# Altium PCB PCB1.PcbDoc (part 1 of 2)
Units mm, origin at the board's own origin, x right, y up, seen from the top; angles counter-clockwise.
Board outline 50 x 50 mm, 4 copper layers (Top Layer, GND, VCC, Bottom Layer), stack 1.991 mm thick; 34 components, 63 nets, 262 pads, 258 vias.
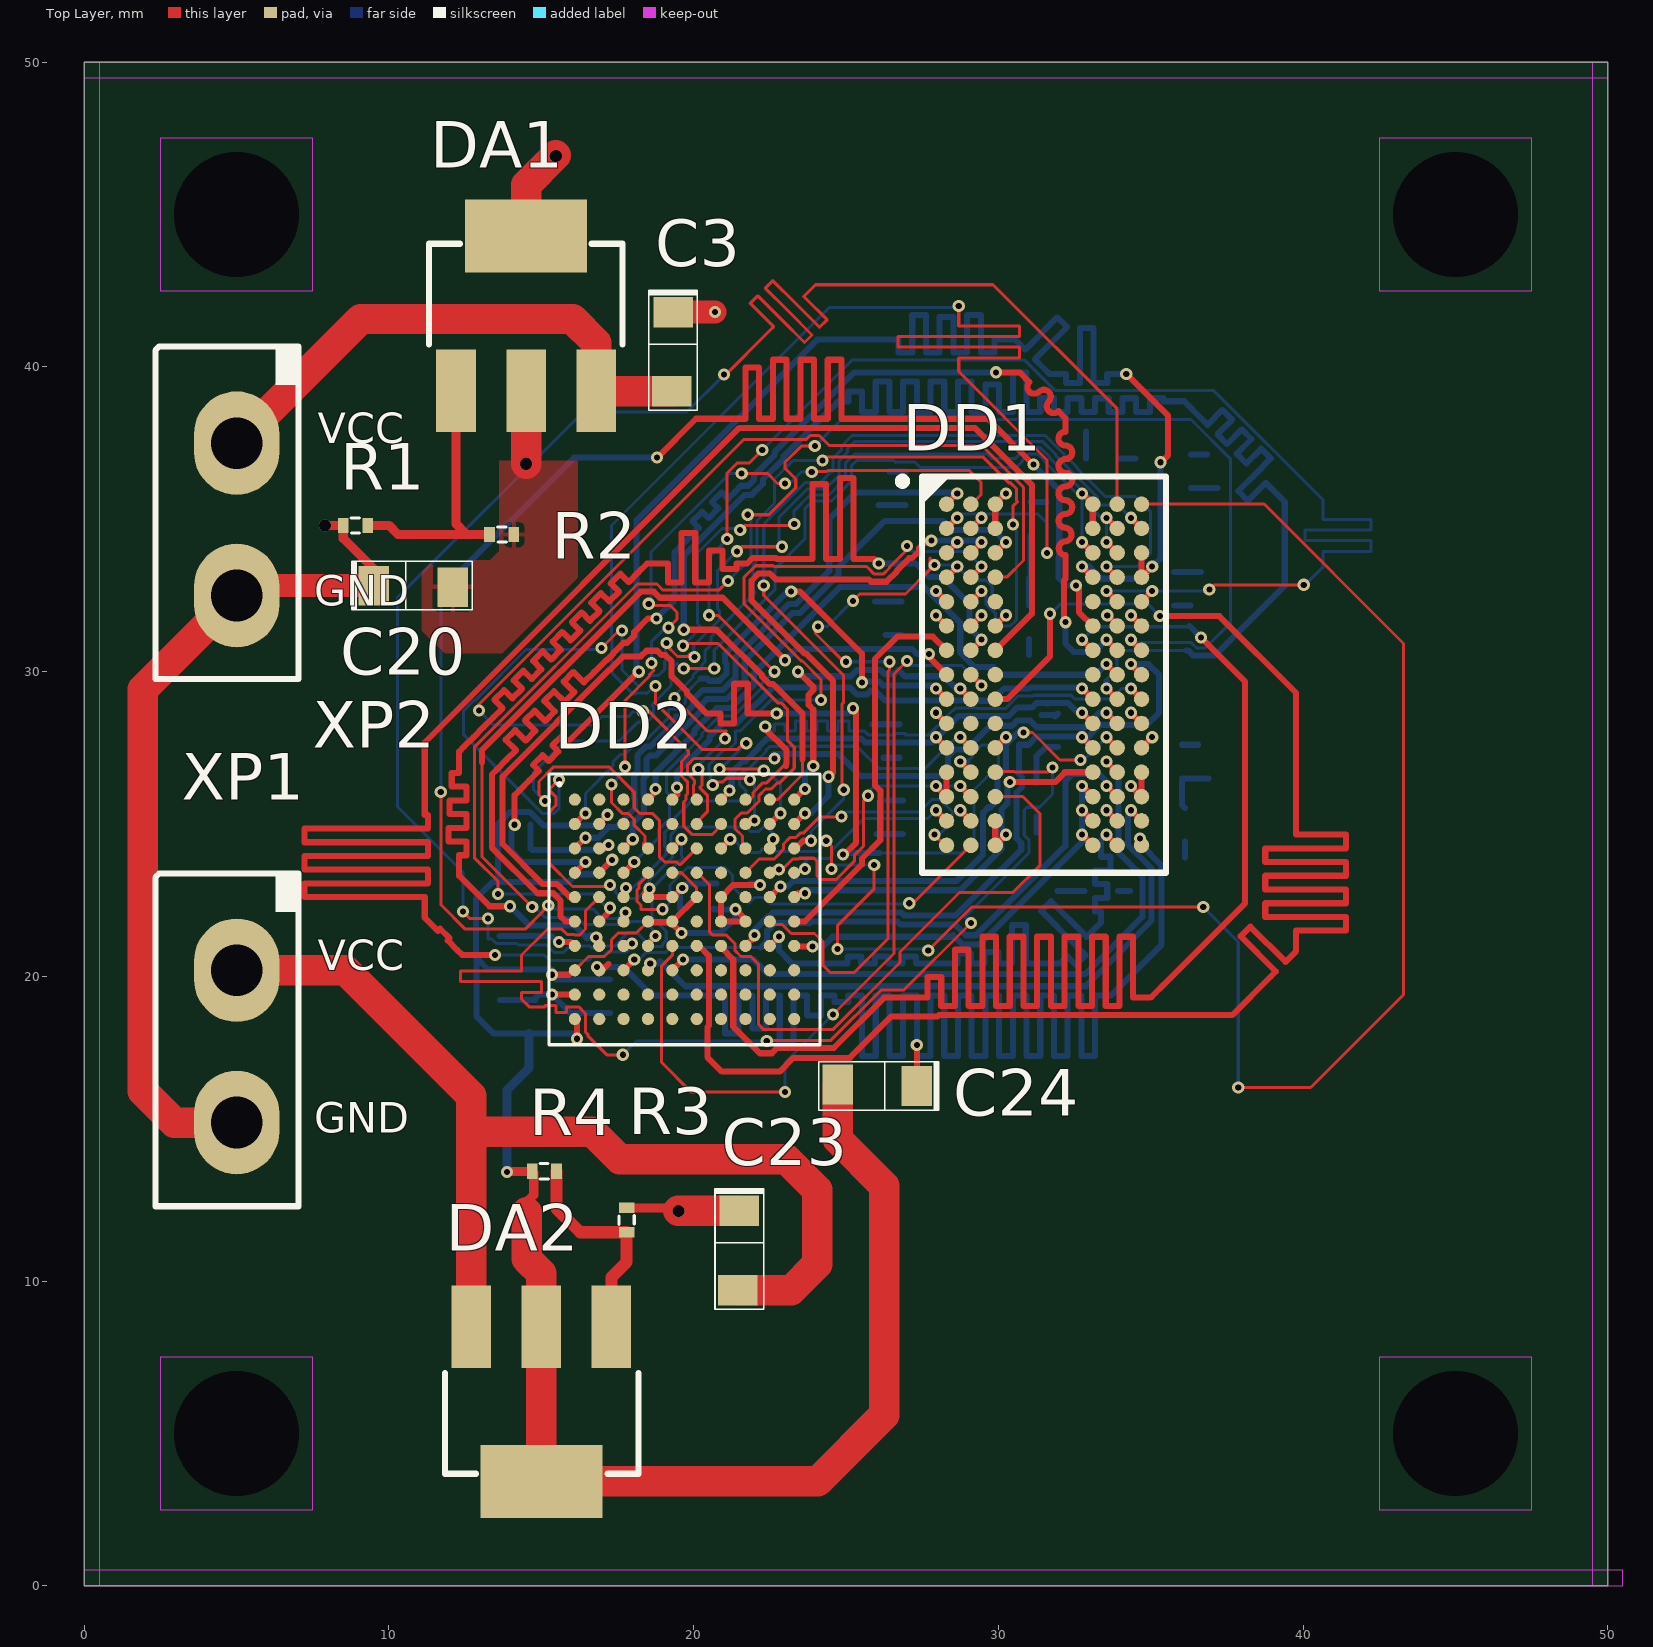
[diagram p0: Top Layer view]
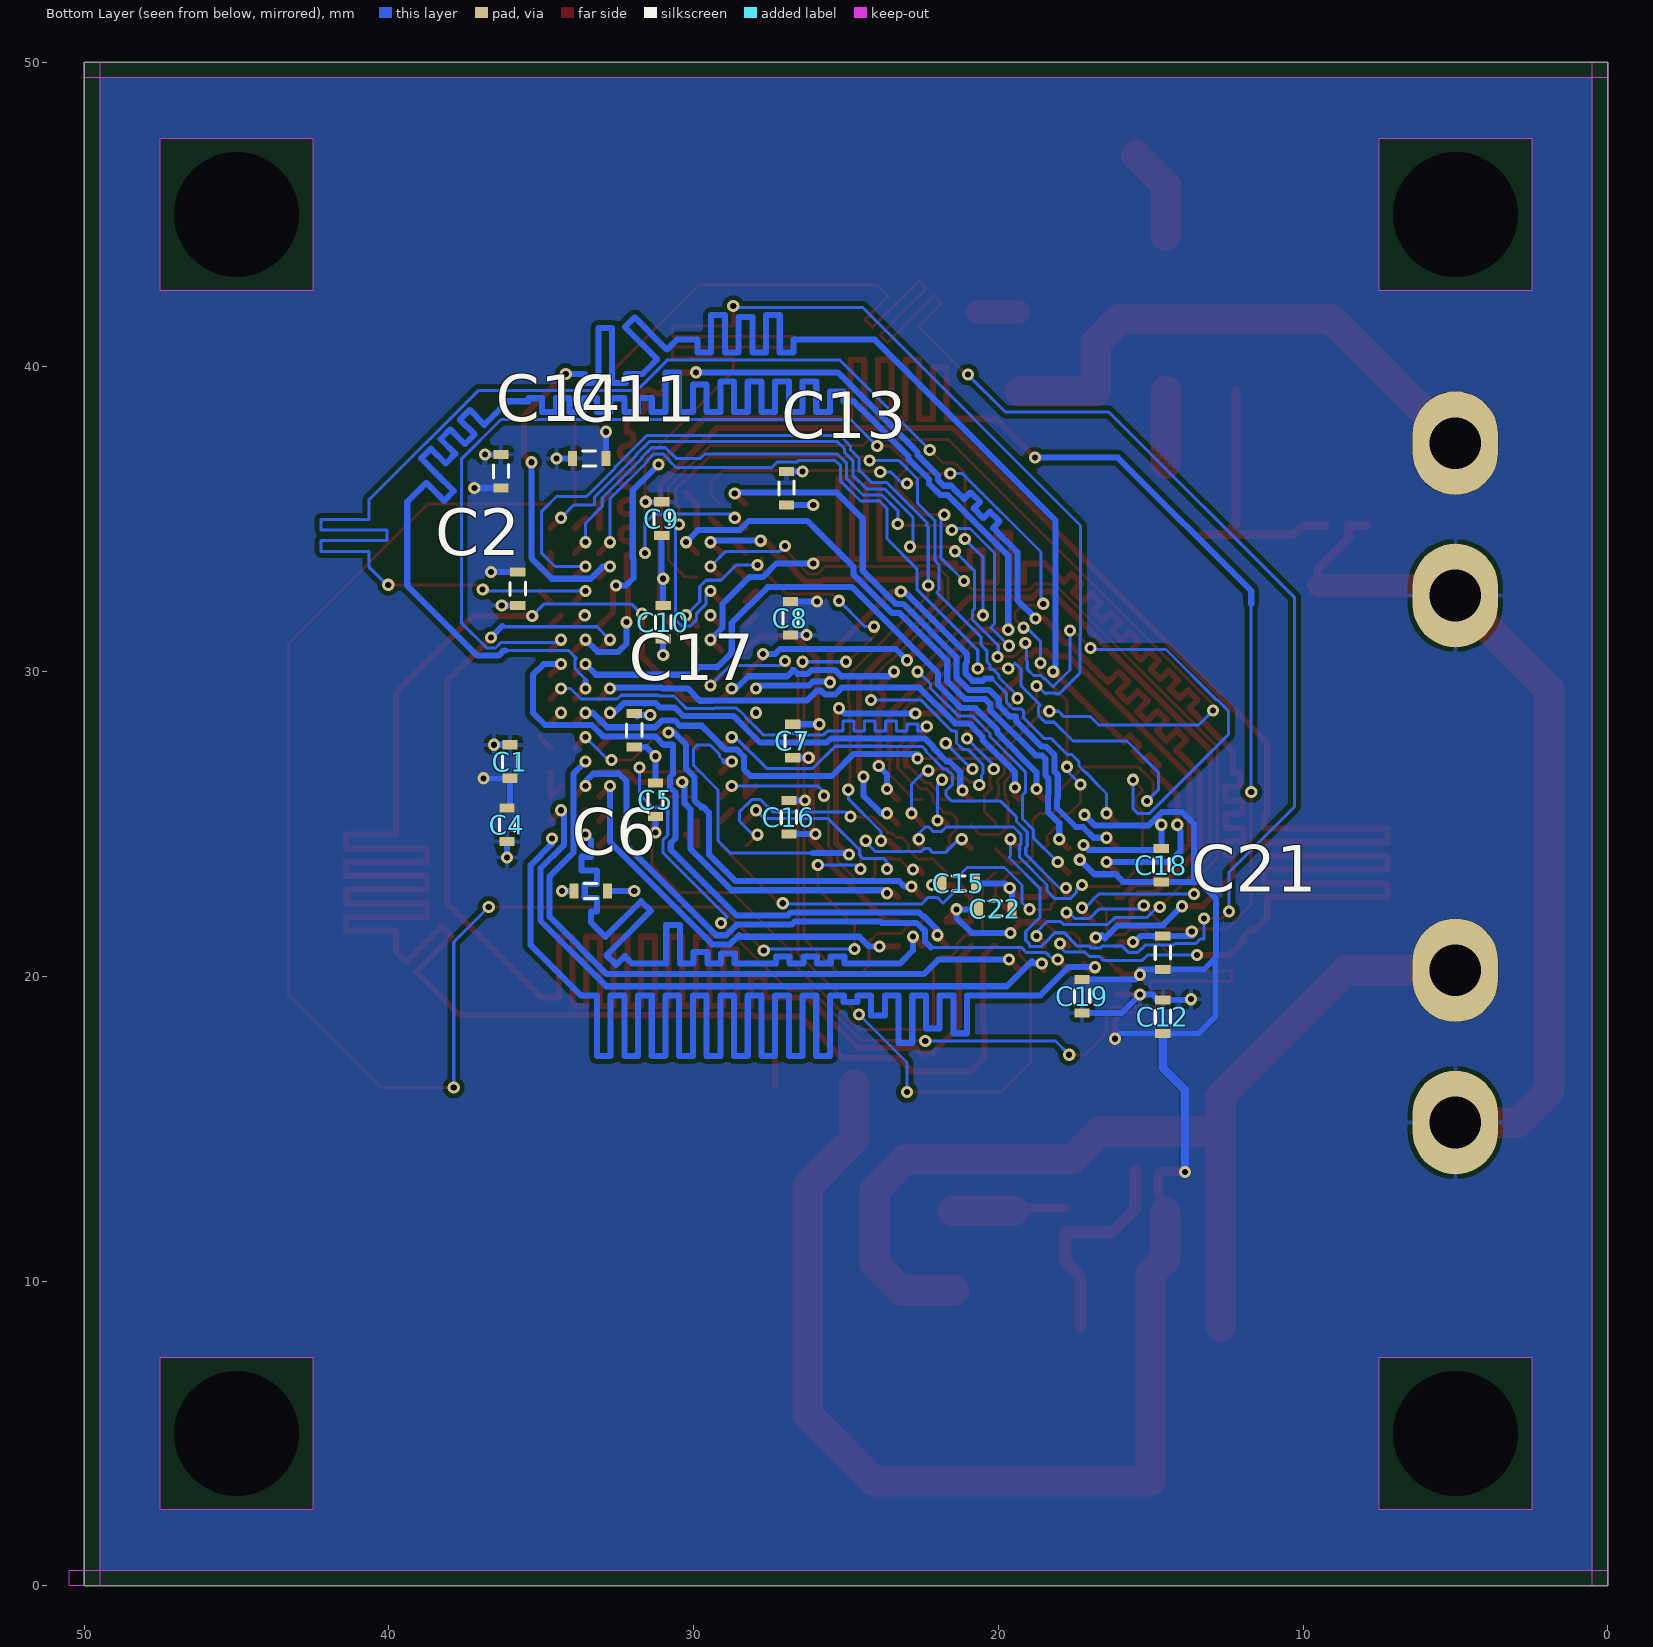
[diagram p1: Bottom Layer view, seen from below]
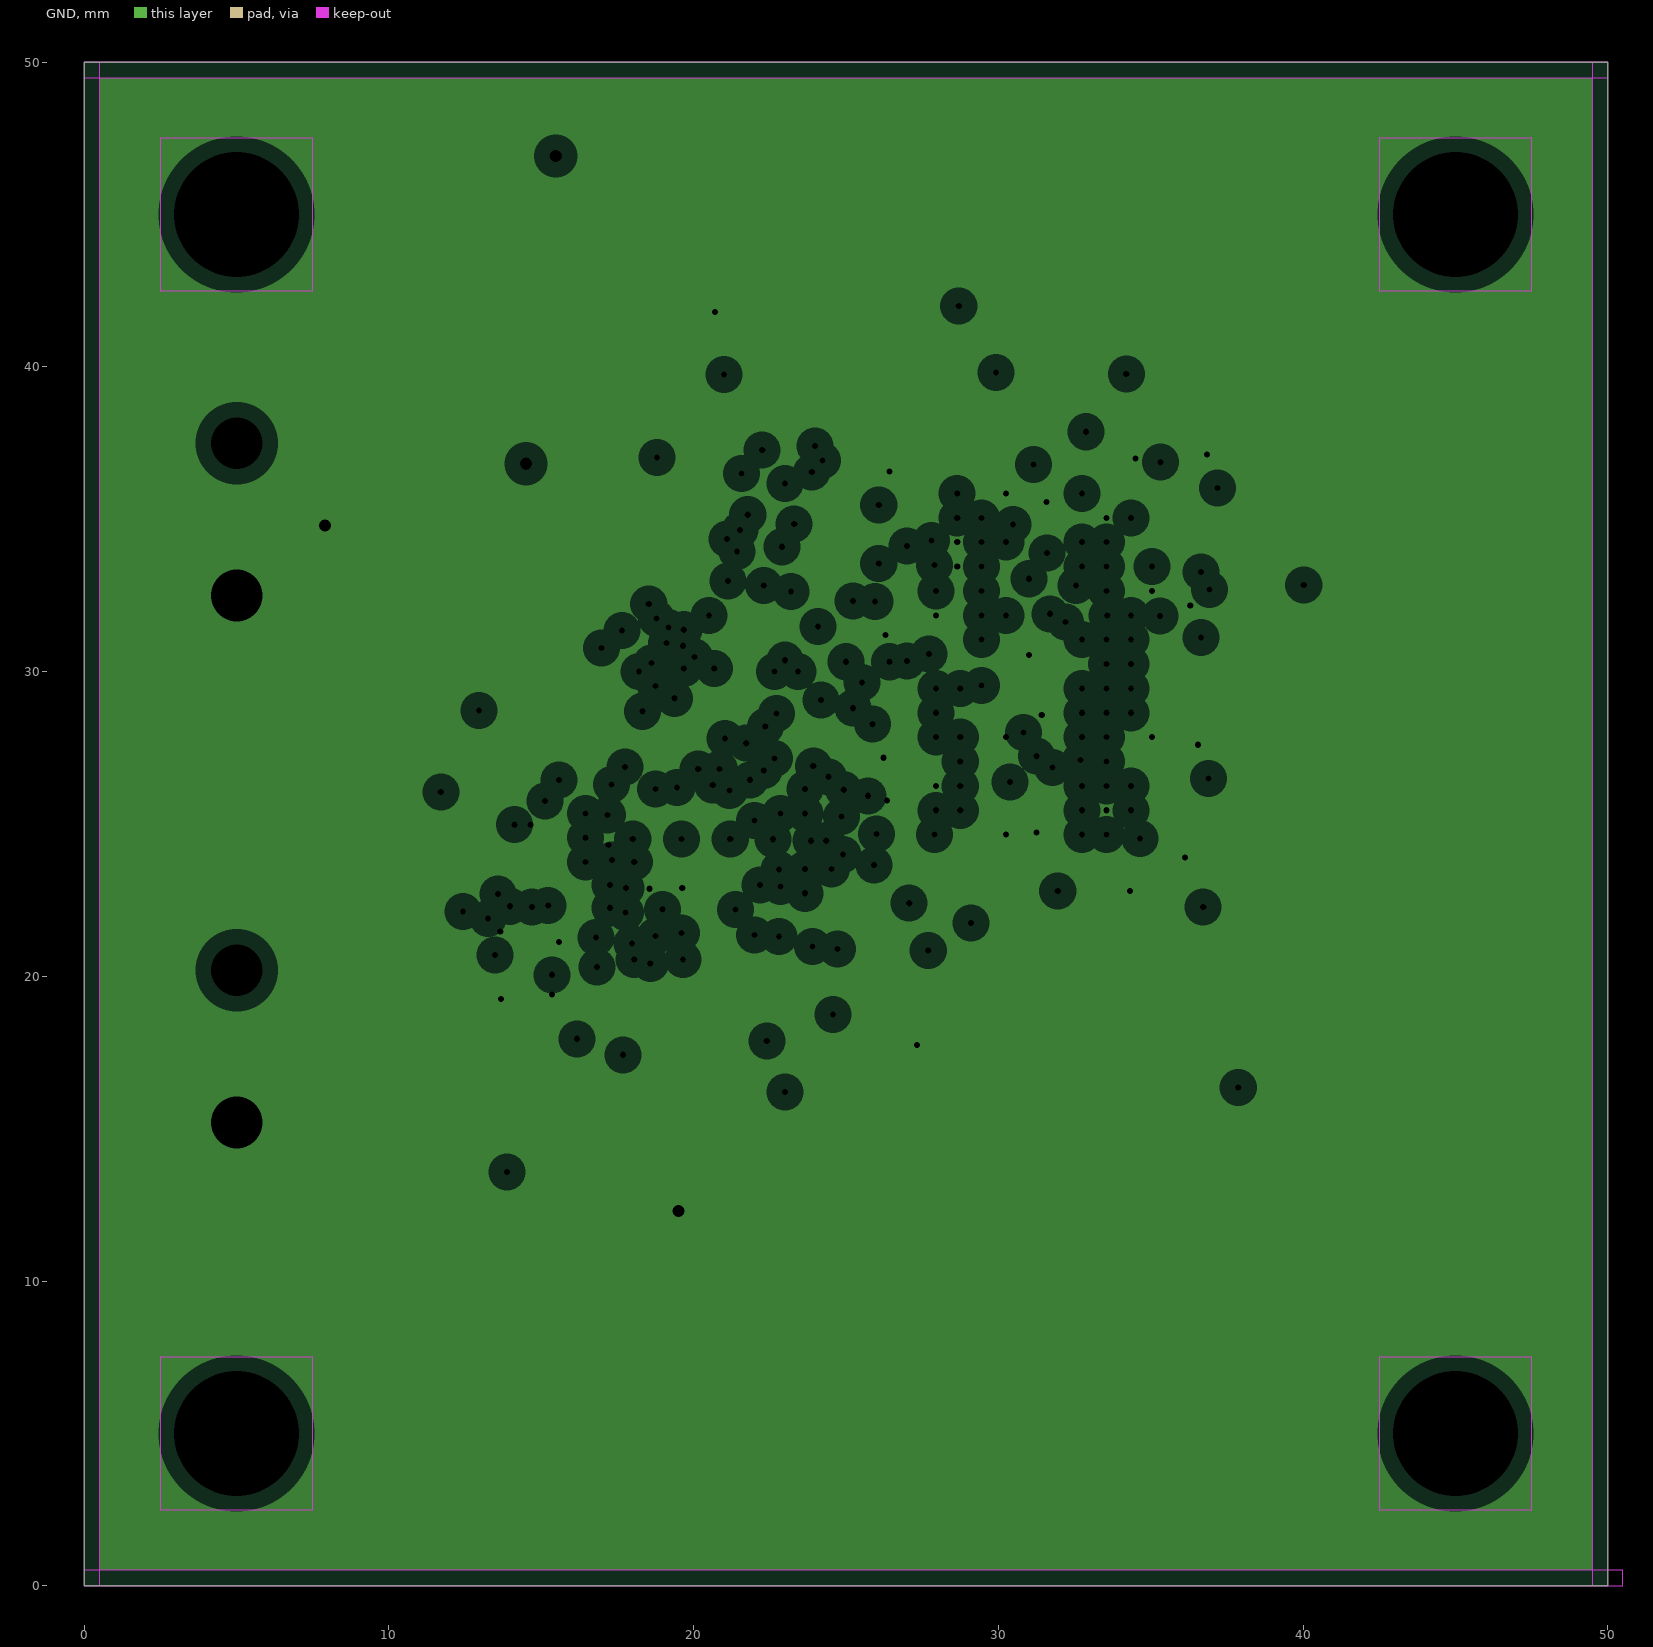
[diagram p2: GND, clearances drawn from the general rule]
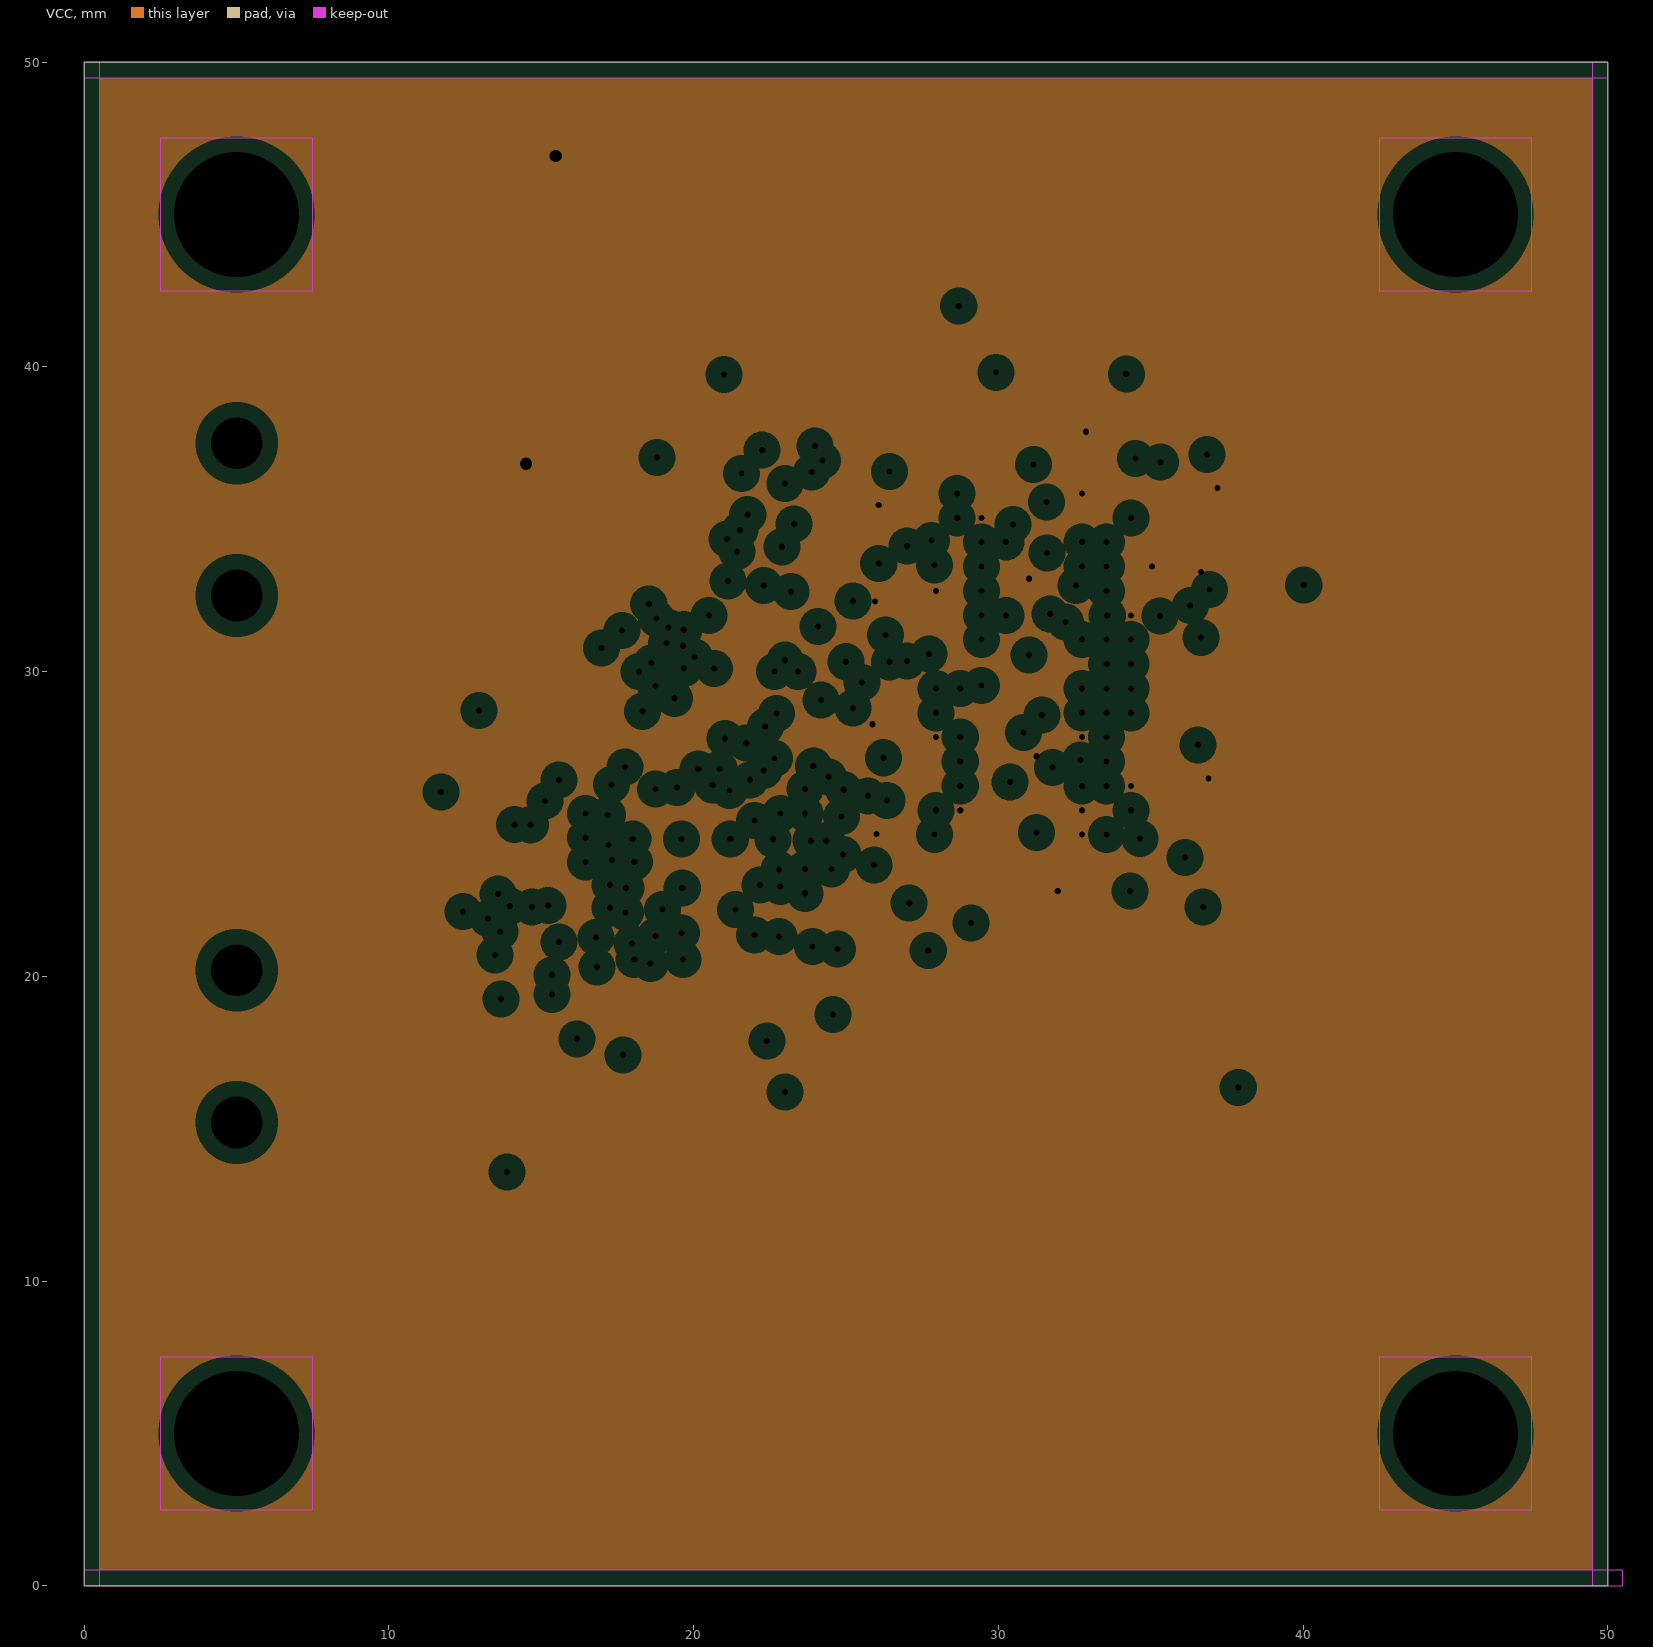
[diagram p3: VCC, clearances drawn from the general rule]
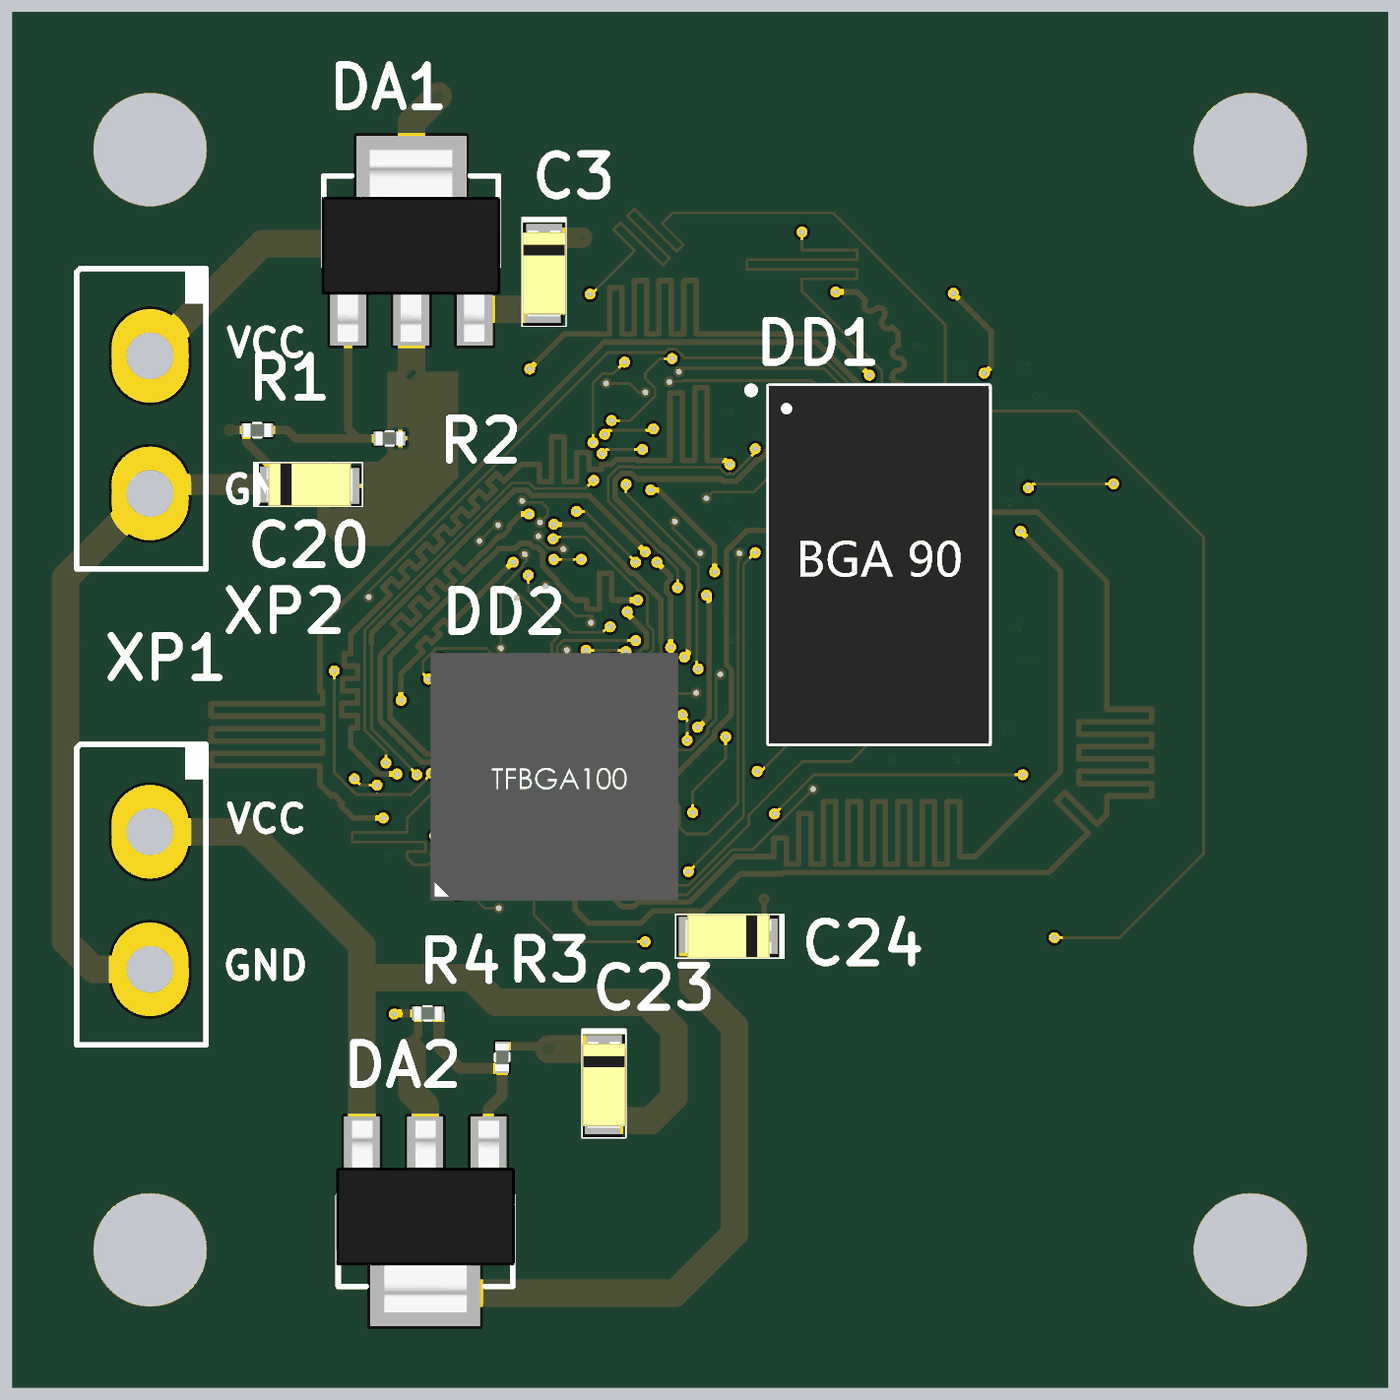
[diagram p5: 3D render of the assembled board from above, using the file's embedded part models]
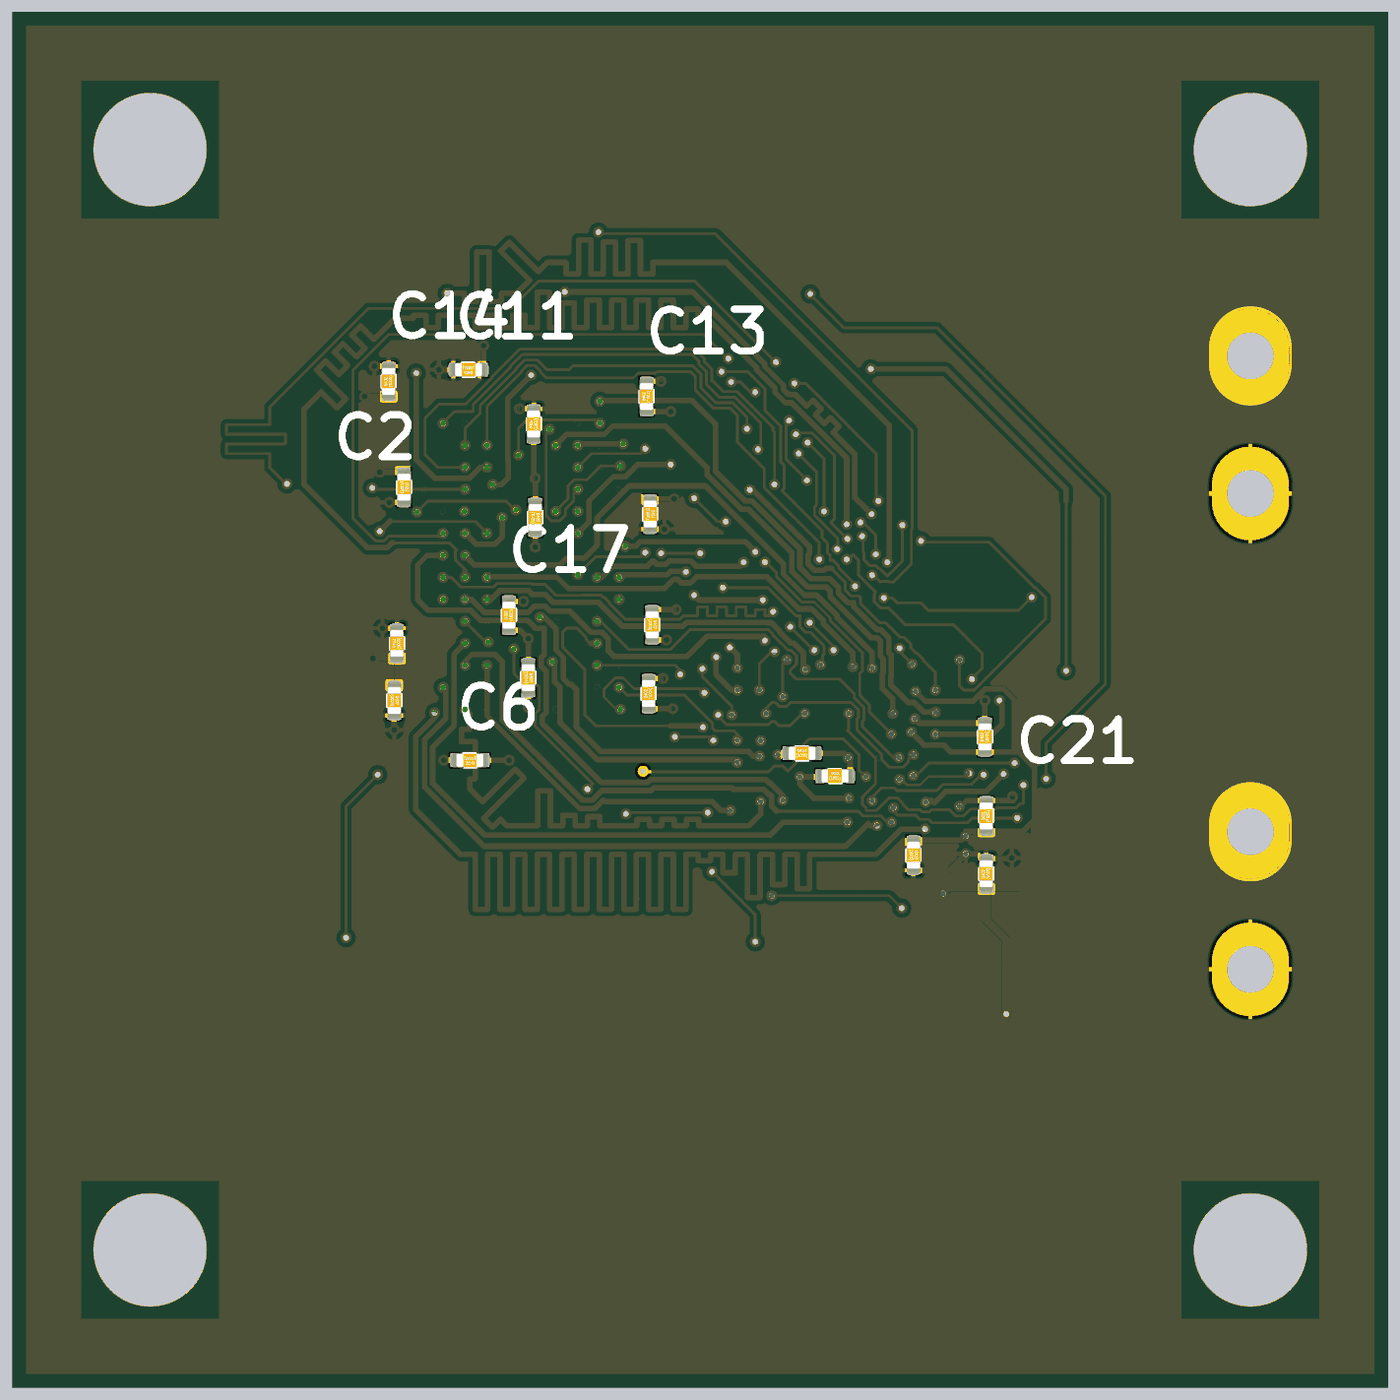
[diagram p6: 3D render of the assembled board from below, using the file's embedded part models]

## Layer stack, top to bottom
Top Solder: solder mask 0.0102, Solder Resist, Dk 3.5
Top Layer: signal copper 0.035
Dielectric 1: prepreg 0.57, FR-4, Dk 4.2
GND: plane copper 0.035, net GND
Dielectric 3: core 0.71, Dk 4.2
VCC: plane copper 0.035, net +3V3
Dielectric 2: prepreg 0.57, Dk 4.2
Bottom Layer: signal copper 0.0356
Bottom Solder: solder mask 0.0102, Solder Resist, Dk 3.5

## Board outline
0,0 50,0 50,50 0,50

## Design rules (kind name [scope] priority, off if disabled: settings)
Clearance Clearance_viaGND [IsStitchingVia and InNet('GND')] p1: gap=0.3 ignorepadtopadclearanceinfootprint=FALSE except(0.5: Arc-Hole Track-Hole SMDPad-Hole THPad-Hole Via-Hole Fill-Hole Poly-Hole Region-Hole Text-Hole)
Clearance Clearance_Via [(OnLayer('GND')OR OnLayer('VCC'))AND IsVia] p2: gap=0.25 ignorepadtopadclearanceinfootprint=FALSE except(0.15: Poly-Poly; 0.3: THPad-THPad; 0.5: Arc-Hole Track-Hole SMDPad-Hole THPad-Hole Via-Hole Fill-Hole Poly-Hole Region-Hole Text-Hole)
Clearance Clearance_Pol [(OnLayer('GND')OR OnLayer('VCC'))AND InPolygon] p3: gap=0.1 ignorepadtopadclearanceinfootprint=FALSE except(0.5: Arc-Hole Track-Hole SMDPad-Hole THPad-Hole Via-Hole Fill-Hole Poly-Hole Region-Hole Text-Hole)
Clearance Clearance_Dig [InNetClass('DIGIt')] p4: gap=0.15 ignorepadtopadclearanceinfootprint=FALSE except(0: Arc-Hole Track-Hole SMDPad-Hole THPad-Hole Via-Hole Fill-Hole Poly-Hole Region-Hole Text-Hole; 0.1: Arc-Arc Arc-Track Arc-SMDPad Arc-Via Arc-Fill Track-Track Track-SMDPad Track-Via Track-Fill SMDPad-SMDPad SMDPad-Via SMDPad-Fill THPad-Via THPad-Fill Via-Via Via-Fill Fill-Fill; 0.3: THPad-THPad; 0.5: Arc-THPad Track-THPad SMDPad-THPad)
MatchedLengths [InNetClass('DIGIt')] p1: tolerance=2 checknetsindiffpair=FALSE checkdiffpairvsdiffpair=TRUE checkxsignals=TRUE checkothers=TRUE
PlaneClearance [InNetClass('DIGIt') OR InNetClass('Power')] p1: clearance=0.25
PlaneConnect [InNetClass('DIGIt') OR InNetClass('Power')] p1: planeconnectstyle=Relief reliefexpansion=0.3 reliefentries=4 reliefconductorwidth=0.15 reliefairgap=0.15
PolygonConnect [InNetClass('DIGIt') OR InNetClass('Power')] p1: connectstyle=Relief reliefconductorwidth=0.15 reliefentries=4 polygonreliefangle="90 Angle" airgapwidth=0.15
RoutingVias [InNetClass('DIGIt')OR InNetClass('Power')] p1: holewidth=0.2 width=0.4 viastyle="Through Hole" minholewidth=0.2 minwidth=0.4 maxholewidth=0.2 maxwidth=0.4
SolderMaskExpansion [All] p1: expansion=0.102
Width Width_Power [InNetClass('Power')] p1: maxlimit=10 minlimit=0.1 preferedwidth=0.5
Width Width_Dig [InNetClass('DIGIt')] p2: maxlimit=1 minlimit=0.1 preferedwidth=0.4
28 further rules are at their usual default settings.

## Classes and differential pairs
net class DIGIt: A0 A1 A2 A3 A4 A5 A6 A7 A8 A9 A10 A11 BA0 BA1 CAS CKE CLK CS DQ0 DQ1 DQ2 DQ3 DQ4 DQ5 DQ6 DQ7 DQ8 DQ9 DQ10 DQ11 DQ12 DQ13 DQ14 DQ15 DQ16 DQ17 DQ18 DQ19 DQ20 DQ21 DQ22 DQ23 DQ24 DQ25 DQ26 DQ27 DQ28 DQ29 DQ30 DQ31 DQM0 DQM1 DQM2 DQM3 RAS WE
net class Power: +1V8 +3V3 GND NetC3_1 NetC23_1 NetDA2_1

## Components (designator, comment, footprint, x,y, rotation, side; value= is the part's Value field where it differs from the comment)
C1 "*" CAP0402_min 36.025,27.05 r90 bottom
C2 "*" CAP0402_min 35.775,32.725 r270 bottom
C3 "*" "Capasitor Tantal TypeA MIN" 19.3,40.5 r90 top
C4 "*" CAP0402_min 36.125,24.975 r270 bottom
C5 "*" CAP0402_min 31.25,25.8 r270 bottom
C6 "*" CAP0402_min 33.375,22.8 r0 bottom
C7 "*" CAP0402_min 26.75,27.725 r270 bottom
C8 "*" CAP0402_min 26.825,31.75 r270 bottom
C9 "*" CAP0402_min 31.05,35.025 r90 bottom
C10 "*" CAP0402_min 31,31.625 r270 bottom
C11 "*" CAP0402_min 33.425,37 r0 bottom
C12 "*" CAP0402_min 14.6,18.675 r90 bottom
C13 "*" CAP0402_min 26.95,36.025 r90 bottom
C14 "*" CAP0402_min 36.325,36.575 r90 bottom
C15 "*" CAP0402_min 21.3,23.05 r180 bottom
C16 "*" CAP0402_min 26.875,25.225 r90 bottom
C17 "*" CAP0402_min 31.95,28.075 r90 bottom
C18 "*" CAP0402_min 14.65,23.65 r90 bottom
C19 "*" CAP0402_min 17.25,19.35 r270 bottom
C20 "*" "Capasitor Tantal TypeA MIN" 10.8,32.8 r180 top
C21 "*" CAP0402_min 14.6,20.775 r90 bottom
C22 "*" CAP0402_min 20.1,22.225 r180 bottom
C23 "*" "Capasitor Tantal TypeA MIN" 21.475,11 r90 top
C24 "*" "Capasitor Tantal TypeA MIN" 26.025,16.425 r0 top
DA1 "LD1117S50TR" SOD-223 12.2,39.22 r0 top value=3V
DA2 "LD1117S50TR" SOD-223 17.3,8.5 r180 top value=3V
DD1 "MT48LC4M32B2B5-6A" VFBGA90 31.5,29.9 r0 top
DD2 "stm32f746" BGA100P9X9-81A 19.7,22.2 r0 top
R1 "*" 0402 8.5,34.8 r0 top
R2 "*" 0402 14.1,34.5 r180 top
R3 "*" 0402 17.8,12.4 r270 top
R4 "*" 0402 14.7,13.6 r0 top
XP1 "под клемники" KLS2-EDR-500-2P 5,37.5 r270 top
XP2 "под клемники" KLS2-EDR-500-2P 5,20.2 r270 top

## Footprints (in the part's own frame and the unit in brackets; to place one, negate y for a bottom-side part, rotate by r counter-clockwise, add the part's x,y. Pads: shape width x height; smd on the part's side, far side on the other; paste and mask are expansions set on the pad)
0402 [mm]
  rect 0.35x0.5 smd mask+0.07: 1(0,0) 2(0.8,0)
  silkscreen extent 0.25,-0.25 0.54,0.25, body extent -0.1,-0.25 0.9,0.25, height 0.25
BGA100P9X9-81A [mm]
  round 0.4 smd mask+0.05: A1(-3.6,3.6) A2(-2.8,3.6) A3(-2,3.6) A4(-1.2,3.6) A5(-0.4,3.6) A6(0.4,3.6) A7(1.2,3.6) A8(2,3.6) A9(2.8,3.6) A10(3.6,3.6) B1(-3.6,2.8) B2(-2.8,2.8) B3(-2,2.8) B4(-1.2,2.8) B5(-0.4,2.8) B6(0.4,2.8) B7(1.2,2.8) B8(2,2.8) B9(2.8,2.8) B10(3.6,2.8) C1(-3.6,2) C2(-2.8,2) C3(-2,2) C4(-1.2,2) C5(-0.4,2) C6(0.4,2) C7(1.2,2) C8(2,2) C9(2.8,2) C10(3.6,2) D1(-3.6,1.2) D2(-2.8,1.2) D3(-2,1.2) D4(-1.2,1.2) D5(-0.4,1.2) D6(0.4,1.2) D7(1.2,1.2) D8(2,1.2) D9(2.8,1.2) D10(3.6,1.2) E1(-3.6,0.4) E2(-2.8,0.4) E3(-2,0.4) E4(-1.2,0.4) E5(-0.4,0.4) E6(0.4,0.4) E7(1.2,0.4) E8(2,0.4) E9(2.8,0.4) E10(3.6,0.4) F1(-3.6,-0.4) F2(-2.8,-0.4) F3(-2,-0.4) F4(-1.2,-0.4) F5(-0.4,-0.4) F6(0.4,-0.4) F7(1.2,-0.4) F8(2,-0.4) F9(2.8,-0.4) F10(3.6,-0.4) G1(-3.6,-1.2) G2(-2.8,-1.2) G3(-2,-1.2) G4(-1.2,-1.2) G5(-0.4,-1.2) G6(0.4,-1.2) G7(1.2,-1.2) G8(2,-1.2) G9(2.8,-1.2) G10(3.6,-1.2) H1(-3.6,-2) H2(-2.8,-2) H3(-2,-2) H4(-1.2,-2) H5(-0.4,-2) H6(0.4,-2) H7(1.2,-2) H8(2,-2) H9(2.8,-2) H10(3.6,-2) J1(-3.6,-2.8) J2(-2.8,-2.8) J3(-2,-2.8) J4(-1.2,-2.8) J5(-0.4,-2.8) J6(0.4,-2.8) J7(1.2,-2.8) J8(2,-2.8) J9(2.8,-2.8) J10(3.6,-2.8) K1(-3.6,-3.6) K2(-2.8,-3.6) K3(-2,-3.6) K4(-1.2,-3.6) K5(-0.4,-3.6) K6(0.4,-3.6) K7(1.2,-3.6) K8(2,-3.6) K9(2.8,-3.6) K10(3.6,-3.6)
  silkscreen extent -4.44,-4.44 4.44,4.44, body extent -4.5,-4.5 4.5,4.5, height 1
CAP0402_min [mm]
  rect 0.3x0.5 smd mask+0.07: 1(-0.55,0) 2(0.55,0)
  silkscreen extent -0.23,-0.25 0.23,0.25, body extent -0.73,-0.25 0.73,0.25, height 0.51
"Capasitor Tantal TypeA MIN" [mm]
  rect 1x1.3 smd: 1(-1.3,0.025) 2(1.3,-0.025)
  silkscreen extent -1.92,-0.83 2.03,0.77, body extent -1.6,-0.83 1.6,0.78, height 1.61
KLS2-EDR-500-2P [mm]
  oval 3.4x2.8 hole 1.7: 1(0,0) 2(5,0)
  silkscreen extent -3.18,-2.67 7.75,2.03, body extent -3,-20.69 7.49,1.64, height 18.12
SOD-223 [mm]
  rect 1.3x2.7 smd: 1(0,0) 2(2.3,0) 3(4.6,0)
  rect 4x2.4 smd: 2(2.3,5.08)
  silkscreen extent -0.89,1.52 5.46,4.83, body extent -0.96,-1.19 5.54,5.77, height 1.7
VFBGA90 [mm] "BGA, 90-Leads, Body 8,00x13,00mmx1,00mm, Pitch 0,80mm"
  round 0.51 smd mask+0.05: A1(-3.2,5.6) A2(-2.4,5.6) A3(-1.6,5.6) A7(1.6,5.6) A8(2.4,5.6) A9(3.2,5.6) B1(-3.2,4.8) B2(-2.4,4.8) B3(-1.6,4.8) B7(1.6,4.8) B8(2.4,4.8) B9(3.2,4.8) C1(-3.2,4) C2(-2.4,4) C3(-1.6,4) C7(1.6,4) C8(2.4,4) C9(3.2,4) D1(-3.2,3.2) D2(-2.4,3.2) D3(-1.6,3.2) D7(1.6,3.2) D8(2.4,3.2) D9(3.2,3.2) E1(-3.2,2.4) E2(-2.4,2.4) E3(-1.6,2.4) E7(1.6,2.4) E8(2.4,2.4) E9(3.2,2.4) F1(-3.2,1.6) F2(-2.4,1.6) F3(-1.6,1.6) F7(1.6,1.6) F8(2.4,1.6) F9(3.2,1.6) G1(-3.2,0.8) G2(-2.4,0.8) G3(-1.6,0.8) G7(1.6,0.8) G8(2.4,0.8) G9(3.2,0.8) H1(-3.2,0) H2(-2.4,0) H3(-1.6,0) H7(1.6,0) H8(2.4,0) H9(3.2,0) J1(-3.2,-0.8) J2(-2.4,-0.8) J3(-1.6,-0.8) J7(1.6,-0.8) J8(2.4,-0.8) J9(3.2,-0.8) K1(-3.2,-1.6) K2(-2.4,-1.6) K3(-1.6,-1.6) K7(1.6,-1.6) K8(2.4,-1.6) K9(3.2,-1.6) L1(-3.2,-2.4) L2(-2.4,-2.4) L3(-1.6,-2.4) L7(1.6,-2.4) L8(2.4,-2.4) L9(3.2,-2.4) M1(-3.2,-3.2) M2(-2.4,-3.2) M3(-1.6,-3.2) M7(1.6,-3.2) M8(2.4,-3.2) M9(3.2,-3.2) N1(-3.2,-4) N2(-2.4,-4) N3(-1.6,-4) N7(1.6,-4) N8(2.4,-4) N9(3.2,-4) P1(-3.2,-4.8) P2(-2.4,-4.8) P3(-1.6,-4.8) P7(1.6,-4.8) P8(2.4,-4.8) P9(3.2,-4.8) R1(-3.2,-5.6) R2(-2.4,-5.6) R3(-1.6,-5.6) R7(1.6,-5.6) R8(2.4,-5.6) R9(3.2,-5.6)
  silkscreen extent -4.77,-6.5 4,6.5, body extent -4,-6.5 4,6.5, height 0.93

## Part data
C1 C2 C4 C5 C6 C7 C8 C9 C10 C11 C12 C13 C14 C15 C16 C17 C18 C19 C21 C22: library part Capasitor
C3 C20 C23 C24: library part "Capasitor Electrolit"
DA1 DA2: Manufacturer="Texas Instruments", Package=SOT-23-6, Part Number=LD1117S50TR, Price=1.58, Quantity=1
DD1: library part mt48lc4m32b2b5-6a, Manufacturer=MICRON, Package=VBGA90, Documantation=https://www.micron.com/parts/dram/sdram/mt48lc4m32b2b5-6a-it, Part Number=MT48LC4M32B2B5-6A, Price=10, Quantity=1
DD2: Manufacturer=STM, Package=LQFP48, Part Number=stm32f746, Quantity=1
R1 R2 R3 R4: library part Resistor
XP1 XP2: library part Connector_Power

## Free pads (board coordinates)
  round 0 hole 4.1: -(5,5) -(5,45) -(45,5) -(45,45)

## Via types
v1: diameter 0.4, hole 0.2, Top Layer to Bottom Layer, tented both sides, 113 vias
v2: diameter 0.4, hole 0.2, Top Layer to Bottom Layer, tented bottom, 87 vias
v3: diameter 0.4, hole 0.2, GND to Bottom Layer, tented bottom, 28 vias
v4: diameter 0.4, hole 0.2, Top Layer to GND, tented top, 14 vias
v5: diameter 0.4, hole 0.2, Top Layer to VCC, tented top, 11 vias
v6: diameter 0.4, hole 0.4, Top Layer to VCC, tented top, 2 vias
v7: diameter 0.4, hole 0.4, Top Layer to GND, tented top, 2 vias
v8: diameter 0.4, hole 0.2, Top Layer to Bottom Layer, 1 vias

## Nets (pads, with @x,y where several pads share a name; then routed paths per layer and width w, separated by ;. In a path a pad name is that pad's centre, name@x,y a point inside that pad or via, vN(x,y) a via of type N, cw(c..) or ccw(c..) an arc to the next point about the centre after c; other vN are vias at no path point)
+1V8: C12.1 C15.1 C18.1 C19.1 C21.1 C22.1 C24.1 DA2.2 DD2.B2 DD2.D2 DD2.D5 DD2.E6 DD2.E7 DD2.F4 DD2.F5 DD2.F7 DD2.F8 DD2.H1 DD2.K1 R4.1 | length 79.4
  Top Layer w0.1: DD2.H1@16.1,20.2 16.55,20.65 17.075,20.65 17.3,20.875 17.3,21.2 17.525,21.425 17.83,21.425 17.831,21.426 18.126,21.426 DD2.F4@18.5,21.8 ; DD2.D5@19.3,23.4 19.6,23.4 20.1,22.9 DD2.E6@20.1,22.6
  Top Layer w0.2: v2(15.351,20.051) 15.901,20.051 16.075,20.225 DD2.H1@16.1,20.2 ; DD2.K1@16.1,18.6 16.175,18.525 v2(16.175,17.95) ; DD2.D2@16.9,23.4 v2(17.325,23.825) ; DD2.B2@16.9,25 16.9,25.025 v2@17.176,25.301 ; DD2.F4@18.5,21.8 18.525,21.775 19.275,21.775 DD2.F5@19.3,21.8 ; v1(19.6,21.425) 19.3,21.725 DD2.F5@19.3,21.8 ; DD2.E6@20.1,22.6 DD2.F5@19.3,21.8 ; v1(21.375,22.2) 21.7,21.875 DD2.F8@21.7,21.8 DD2.F7@20.9,21.8 DD2.E7@20.9,22.6 21.3,23 v2(22.176,23.001) v2(22.176,23.001) v2@22.177,23
  Top Layer w0.3: v2(13.875,13.575) 13.9,13.6 R4.1@14.7,13.6 14.75,13.55 14.75,12.825 14.525,12.6 14.525,12.25
  Top Layer w1: 14.525,12.25 14.525,10.725 15,10.25 DA2.2@15,8.5 DA2.2@15,3.42 24.07,3.42 26.25,5.6 26.25,13.125 24.725,14.65 C24.1@24.725,16.45
  Bottom Layer w0.2: v2(15.351,20.051) 15.502,19.9 C19.1@17.25,19.9 ; v2@15.35,20.225 C21.1@14.6,20.225 13.25,20.225 12.875,20.6 ; v2(16.175,17.95) 16,18.125 C12.1@14.6,18.125 13.425,18.125 12.875,18.675 12.875,20.6 ; v2@17.176,25.301 16.825,24.95 15.076,24.95 14.626,25.4 13.984,25.4 13.575,24.991 13.575,23.1 ; v2(17.325,23.825) 16.85,23.35 16.15,23.35 15.9,23.1 C18.1@14.65,23.1 13.575,23.1 ; v1(19.6,21.425) 20.875,21.425 21.375,21.925 v1(21.375,22.2) 20.675,22.2 C22.1@20.65,22.225 ; C15.1@21.85,23.05 22.225,23.05 v2(22.176,23.001) ; 12.875,20.6 12.85,20.625 12.85,22.541 13.409,23.1 13.575,23.1
  Bottom Layer w0.3: v2(13.875,13.575) 13.875,16.275 14.6,17 C12.1@14.6,18.125
  other v2: 17.176,25.301
+3V3: C1.1 C2.1 C4.1 C5.1 C6.1 C7.1 C8.1 C9.1 C10.1 C11.1 C13.1 C14.1 C16.1 C17.1 C20.1 DA1.2 DD1.A7 DD1.B2 DD1.B7 DD1.C9 DD1.D9 DD1.E1 DD1.F9 DD1.L1 DD1.L7 DD1.M9 DD1.N9 DD1.P2 DD1.P7 DD1.R7 R2.1 | length 26.2
  Top Layer w0.2: v5(27.95,27.85) DD1.L1@28.3,27.5 ; v5(27.95,32.65) DD1.E1@28.3,32.3 ; v5(28.75,25.45) DD1.P2@29.1,25.1 ; DD1.B2@29.1,34.7 v5(29.45,35.05) ; v5(32.75,24.65) DD1.R7@33.1,24.3 ; v5(32.75,25.45) DD1.P7@33.1,25.1 ; v5(32.75,27.85) DD1.L7@33.1,27.5 ; v5(32.75,35.85) DD1.A7@33.1,35.5 DD1.B7@33.1,34.7 ; v5(34.35,26.25) DD1.N9@34.7,25.9 DD1.M9@34.7,26.7 ; v5(34.35,31.85) DD1.F9@34.7,31.5 ; DD1.C9@34.7,33.9 DD1.D9@34.7,33.1 v5(35.05,33.45)
  Top Layer w1: v6(14.5,36.825) DA1.2@14.5,39.22 ; DA1.2@14.5,44.3 14.5,45.975 v6@15.475,46.95
  Bottom Layer w0.2: v3(25.875,28.275) C7.1@26.75,28.275 ; v3(25.95,32.3) C8.1@26.825,32.3 ; v3(26,24.675) C16.1@26.875,24.675 ; v3(26.075,35.475) C13.1@26.95,35.475 ; C10.1@31,32.175 v3(31,33.05) 31.05,33.1 C9.1@31.05,34.475 ; C5.1@31.25,26.35 v3(31.25,27.225) 31.55,27.525 C17.1@31.95,27.525 ; v3(31.95,22.8) C6.1@32.825,22.8 ; C11.1@32.875,37 v3(32.875,37.875) ; C2.1@35.775,33.275 v3(36.65,33.275) ; C4.1@36.125,25.525 36.025,25.625 C1.1@36.025,26.5 v3(36.9,26.5) ; C14.1@36.325,36.025 v3(37.2,36.025)
  other v6: 15.475,46.925
A0: DD1.G8 DD2.F1 | length 50.2
  Top Layer w0.2: DD2.F1@16.1,21.8 15.8,21.8 15.626,21.974 15.626,22.492 15.391,22.726 14.874,22.726 13.375,24.225 13.375,26.624 13.534,26.783 13.852,27.102 14.17,27.42 13.824,27.766 14.143,28.084 14.489,27.738 14.807,28.056 14.461,28.402 14.779,28.72 15.125,28.374 15.443,28.693 15.097,29.039 15.415,29.357 15.761,29.011 16.08,29.329 15.734,29.675 16.052,29.993 16.398,29.647 16.716,29.965 16.75,30 17.126,30.375 17.141,30.375 17.375,30.609 17.375,30.624 17.701,30.95 17.816,30.95 18.05,31.184 18.05,31.299 18.501,31.75 v2(18.775,31.75) ; v2(29.925,39.825) 30.7,39.825 31.018,39.507 ccw(c31.177,39.348) 31.336,39.189 cw(c31.495,39.03) 31.655,38.87 ccw(c31.814,38.711) 31.973,38.552 32.2,38.325 32.2,37.875 ccw(c32.2,37.65) 32.2,37.425 cw(c32.2,37.2) 32.2,36.975 ccw(c32.2,36.75) 32.2,36.525 cw(c32.2,36.3) 32.2,36.075 ccw(c32.2,35.85) 32.2,35.625 cw(c32.2,35.4) 32.2,35.175 ccw(c32.2,34.95) 32.2,34.725 cw(c32.176,34.5) 32.2,34.275 ccw(c32.207,34.05) 32.2,33.825 32.2,33.625 32.2,33.041 32.15,32.991 32.15,31.675 v2(32.2,31.625) ; v1(33.55,31.05) DD1.G8@33.9,30.7
  Bottom Layer w0.2: v2(18.775,31.75) 19.376,32.351 19.376,32.576 19.376,33.026 19.376,33.476 19.376,33.925 19.535,34.084 19.853,34.403 20.171,34.721 19.96,34.932 20.279,35.25 20.49,35.039 20.808,35.357 20.597,35.568 20.915,35.886 21.126,35.675 21.363,35.912 21.552,36.101 21.789,36.101 21.976,36.288 21.976,36.435 22.65,37.109 22.65,37.199 25.276,39.825 v2(29.925,39.825) ; v2(32.2,31.625) 32.2,30.925 32.475,30.65 33.15,30.65 v1(33.55,31.05)
A1: DD1.G9 DD2.F2 | length 51.2
  Top Layer w0.1: v2(13.575,22.7) 13.575,23.117 12.8,23.892 12.8,27.519 18.157,32.877 18.795,32.877 18.997,32.675 20.825,32.675 v2(21.125,32.975) ; v2(21.775,35.15) 22.469,35.15 23.351,36.032 23.351,36.322 23,36.673 23,36.875 23.527,37.402 v2(23.976,37.402)
  Top Layer w0.2: DD2.F2@16.9,21.8 17.258,22.158 v1(17.258,22.251) ; v1(34.35,31.05) DD1.G9@34.7,30.7
  Bottom Layer w0.1: v2(13.575,22.7) 16.7,22.7 17.149,22.251 v1(17.258,22.251) ; v2(21.125,32.975) 21.876,33.726 21.876,35.049 v2(21.775,35.15) ; v2(23.976,37.402) 23.976,37.396 24.855,38.275 36.325,38.275 37.625,36.975 37.625,31.605 36.795,30.775 36.505,30.775 36.33,30.95 34.45,30.95 v1(34.35,31.05)
A2: DD1.F7 DD2.F3 | length 61.4
  Top Layer w0.1: v2(11.7,26.05) 11.7,22.355 12.505,21.55 14.47,21.55 15.05,22.13 15.05,22.15 v2(15.226,22.326)
  Top Layer w0.2: DD2.F3@17.7,21.8 17.675,21.825 17.758,21.908 v1(17.758,22.1) ; v2(18.8,37.025) 20.077,38.302 21.475,38.302 21.7,38.302 21.7,39.981 22.15,39.981 22.15,38.302 22.6,38.302 22.6,40.237 23.05,40.237 23.05,38.302 23.5,38.302 23.5,40.237 23.95,40.237 23.95,38.302 24.4,38.302 24.4,40.237 24.85,40.237 24.85,38.302 25.3,38.302 27.575,38.302 29.648,38.302 v2(31.15,36.8) ; v2(32.55,32.825) 32.645,32.73 32.645,31.955 DD1.F7@33.1,31.5
  Bottom Layer w0.1: v2(11.7,26.05) 11.7,32.225 ; v2(15.226,22.326) 15.116,22.216 15.128,22.205 16.7,22.205 17.004,21.901 17.496,21.901 v1@17.67,22.075
  Bottom Layer w0.2: 11.7,32.225 11.7,32.65 16.075,37.025 v2(18.8,37.025) ; v2(31.15,36.8) 32,35.95 32,33.734 31.975,33.709 31.975,33.075 32.225,32.825 v2(32.55,32.825)
A3: DD1.F3 DD2.F9 | length 26.7
  Top Layer w0.1: DD2.F9@22.5,21.8 22.6,21.7 22.905,21.7 23.2,21.405 23.965,21.405 24.25,21.12 24.25,20.355 24.48,20.125 25.275,20.125 26.375,21.225 26.375,25.656 26.376,25.657 26.376,26.196 26.375,26.197 26.375,30.008 26.425,30.058 v1(26.425,30.325) ; v1(24.076,31.477) 24.023,31.477 24,31.5 24,31.25 24.925,30.325 v1(25,30.325) ; v1(25.225,32.325) 25.45,32.55 26.95,32.55 27.75,33.35 27.75,33.725 27.901,33.574 v1(27.901,33.502)
  Top Layer w0.2: DD1.F3@29.9,31.5 v1(30.25,31.85)
  Bottom Layer w0.1: v1(24.076,31.477) 24.377,31.477 v1(25.225,32.325) ; v1(25,30.325) v1(26.425,30.325) ; v1(27.901,33.502) 28.598,33.502 29.1,33 29.595,33 29.8,32.795 29.8,32.3 v1(30.25,31.85)
A4: DD1.G1 DD2.F10 | length 12.9
  Top Layer w0.2: DD2.F10@23.3,21.8 23.649,21.8 25.525,23.676 25.525,23.868 26.125,24.468 26.125,25.759 26.126,25.761 26.126,26.092 25.95,26.268 25.95,30.416 26.684,31.15 27.85,31.15 DD1.G1@28.3,30.7
A5: DD1.G2 DD2.G2 | length 56.2
  Top Layer w0.2: v2(13.975,22.3) 13.3,22.3 12.3,23.3 12.3,23.525 12.3,23.975 12.55,23.975 12.55,24.425 12.3,24.425 11.95,24.425 11.95,24.875 12.3,24.875 12.55,24.875 12.55,25.325 12.3,25.325 11.99,25.325 11.99,25.775 12.3,25.775 12.55,25.775 12.55,26.225 12.3,26.225 12.06,26.225 12.06,26.675 12.3,26.675 12.3,27.125 12.3,27.373 12.459,27.532 12.777,27.85 13.095,28.168 13.414,28.486 13.732,28.805 13.458,29.079 13.776,29.397 14.05,29.123 14.368,29.441 14.094,29.715 14.412,30.034 14.686,29.759 15.005,30.077 14.73,30.352 15.049,30.67 15.323,30.396 15.641,30.714 15.367,30.988 15.685,31.306 15.959,31.032 16.277,31.35 16.003,31.625 16.321,31.943 16.596,31.668 16.914,31.987 16.64,32.261 16.958,32.579 17.232,32.305 17.55,32.623 17.276,32.897 17.594,33.216 17.868,32.941 18.187,33.259 18.477,33.55 18.702,33.55 19.152,33.55 19.152,32.925 19.602,32.925 19.602,33.55 19.602,34.55 20.052,34.55 20.052,33.55 20.052,32.925 20.502,32.925 20.502,33.55 20.502,33.978 20.952,33.978 20.952,33.55 20.952,33.375 21.402,33.375 21.402,33.55 21.525,33.55 21.752,33.55 21.928,33.727 22.708,33.727 22.734,33.7 23.15,33.7 23.45,33.7 23.9,33.7 23.9,36.153 24.35,36.153 24.35,33.7 24.8,33.7 24.8,36.35 25.25,36.35 25.25,33.7 25.7,33.7 25.925,33.7 v2(26.075,33.55) ; v1@16.876,21.351 v1(16.801,21.276) 16.9,21.177 DD2.G2@16.9,21 ; DD1.G2@29.1,30.7 v1(29.45,31.05)
  Bottom Layer w0.2: v2(13.975,22.3) 14.6,21.675 16.076,21.675 16.501,21.25 16.603,21.351 ; v2(26.075,33.55) 27.287,33.55 27.736,33.102 28.173,33.102 29.05,32.225 29.05,31.45 v1(29.45,31.05)
A6: DD1.G3 DD2.G3 | length 69.2
  Top Layer w0.2: v2(13.476,20.701) 12.399,20.701 12.24,20.86 11.922,21.178 11.992,21.249 11.674,21.567 11.603,21.497 11.285,21.815 11.175,21.925 11.175,22.15 11.175,22.6 7.222,22.6 7.222,23.05 11.175,23.05 11.275,23.05 11.275,23.5 11.175,23.5 7.222,23.5 7.222,23.95 11.175,23.95 11.275,23.95 11.275,24.4 11.175,24.4 7.222,24.4 7.222,24.85 11.175,24.85 11.275,24.85 11.275,25.3 11.175,25.3 11.175,26 11.175,27.675 21.502,38.002 29.23,38.002 31.1,36.131 31.1,31.9 DD1.G3@29.9,30.7 ; DD2.G3@17.7,21 17.78,21.08 17.784,21.076 v1(17.976,21.076)
  Bottom Layer w0.1: v2(13.476,20.701) 15.1,20.701 15.275,20.526 16.557,20.526 16.681,20.65 17.005,20.65 17.155,20.8 17.8,20.8 18.05,21.05 18.02,21.08 18.016,21.076 v1(17.976,21.076)
A7: DD1.H1 DD2.G4 | length 30.1
  Top Layer w0.1: 13.05,27.025 13.05,23.925 v2(14.7,22.275)
  Top Layer w0.2: 13.05,27.025 13.05,27.416 18.261,32.627 18.692,32.627 18.893,32.425 20.95,32.425 v2(23,30.375) ; DD2.G4@18.5,21 18.5,21.075 v1(18.751,21.326) ; v1(27.726,30.576) 27.726,30.474 DD1.H1@28.3,29.9
  Bottom Layer w0.1: v2(14.7,22.275) 14.775,22.275 15.125,21.925 16.18,21.925 16.404,21.701 17.396,21.701 ; v1(18.751,21.326) 18.592,21.326 18.733,21.467 18.4,21.8 17.953,21.8 17.853,21.7 17.397,21.7 ; 17.396,21.701 17.397,21.7
  Bottom Layer w0.2: v2(23,30.375) 23.375,30.75 27.166,30.75 27.339,30.576 v1(27.726,30.576) v1@27.726,30.451
A8: DD1.H2 DD2.G5 | length 27.5
  Top Layer w0.1: DD2.G5@19.3,21 19.3,20.695 18.95,20.345 18.95,17.175 19.925,16.2 v2(23,16.2) ; v2(24.575,18.75) 26.575,20.75 26.575,25.573 26.576,25.574 26.576,26.278 26.575,26.28 26.575,29.925 v2(27,30.35)
  Top Layer w0.2: DD1.H2@29.1,29.9 v1(29.45,29.55)
  Bottom Layer w0.1: v2(23,16.2) 23,17.175 v2(24.575,18.75) ; v2(27,30.35) 27.149,30.201 28.799,30.201 v1(29.45,29.55)
A9: DD1.J3 DD2.G6 | length 69.2
  Top Layer w0.2: DD2.G6@20.1,21 20.175,21 20.5,20.675 20.5,18.384 20.45,18.334 20.45,17.35 20.925,16.875 22.825,16.875 23.275,17.325 25.125,17.325 26.475,18.675 28,18.675 28.05,18.725 37.675,18.725 38.95,20 39.109,20.159 37.952,21.316 38.27,21.634 39.427,20.477 39.745,20.795 39.775,20.825 39.775,21.05 39.775,21.5 41.413,21.5 41.413,21.95 39.775,21.95 38.762,21.95 38.762,22.4 39.775,22.4 41.413,22.4 41.413,22.85 39.775,22.85 38.762,22.85 38.762,23.3 39.775,23.3 41.413,23.3 41.413,23.75 39.775,23.75 38.762,23.75 38.762,24.2 39.775,24.2 41.413,24.2 41.413,24.65 39.775,24.65 39.775,25.1 39.775,29.3 37.25,31.825 v2(35.3,31.825) ; DD1.J3@29.9,29.1 30.3,29.1 31.7,30.5 v2(31.7,31.9)
  Bottom Layer w0.1: v2@31.712,31.888 32.05,32.225 34.9,32.225 v2(35.3,31.825)
A10: DD1.G7 DD2.G7 | length 68.4
  Top Layer w0.2: DD2.G7@20.9,21 20.9,20.95 21.3,20.55 21.3,18.35 22.175,17.475 22.566,17.475 22.741,17.65 24.606,17.65 26.256,19.3 27.45,19.3 27.675,19.3 27.675,19.972 28.125,19.972 28.125,19.3 28.125,19.025 28.575,19.025 28.575,19.3 28.575,20.872 29.025,20.872 29.025,19.3 29.025,19.025 29.475,19.025 29.475,19.3 29.475,21.3 29.925,21.3 29.925,19.3 29.925,19.025 30.375,19.025 30.375,19.3 30.375,21.3 30.825,21.3 30.825,19.3 30.825,19.025 31.275,19.025 31.275,19.3 31.275,21.3 31.725,21.3 31.725,19.3 31.725,19.025 32.175,19.025 32.175,19.3 32.175,21.3 32.625,21.3 32.625,19.3 32.625,19.025 33.075,19.025 33.075,19.3 33.075,21.3 33.525,21.3 33.525,19.3 33.525,19.025 33.975,19.025 33.975,19.3 33.975,21.3 34.425,21.3 34.425,19.3 34.875,19.3 35,19.3 35.159,19.459 35.375,19.675 38.1,22.4 38.1,29.675 v2(36.65,31.125) ; v1(32.75,31.05) DD1.G7@33.1,30.7
  Bottom Layer w0.1: v1(32.75,31.05) 33.175,31.475 36.25,31.475 36.275,31.5
  Bottom Layer w0.2: 36.275,31.5 v2(36.65,31.125)
A11: DD1.H9 DD2.G8 | length 22.1
  Top Layer w0.2: DD2.G8@21.7,21 22.001,21.301 v1(22.001,21.351) ; v1(34.35,30.25) DD1.H9@34.7,29.9
  Bottom Layer w0.2: v1(22.001,21.351) 22.001,21.525 22.455,21.979 22.472,21.962 22.61,22.1 26.809,22.1 26.909,22 28.6,22 30.751,24.151 30.751,24.375 30.6,24.526 30.6,26.034 30.776,26.211 30.776,26.542 30.676,26.642 30.676,27.601 30.992,27.601 31.267,27.876 32.966,27.876 33.34,28.25 34.875,28.25 35.275,28.65 35.275,29.9 34.925,30.25 v1(34.35,30.25)
BA0: DD1.J7 DD2.A5 | length 16.5
  Top Layer w0.2: DD2.A5@19.3,25.8 19.476,25.976 19.451,26.001 v1(19.451,26.201) ; v1(32.75,29.45) DD1.J7@33.1,29.1
  Bottom Layer w0.2: v1(19.451,26.201) 19.451,26.692 20.526,27.767 20.526,27.867 20.96,28.301 21.422,28.301 22.595,29.475 25.134,29.475 25.359,29.25 25.691,29.25 25.816,29.375 25.961,29.375 26.286,29.05 28.584,29.05 29.399,29.05 29.405,29.045 29.795,29.045 30.2,29.45 31.027,29.45 31.054,29.476 32.724,29.476 v1(32.75,29.45)
BA1: DD1.H8 DD2.A4 | length 21
  Top Layer w0.2: DD2.A4@18.5,25.8 18.776,26.076 18.751,26.101 v1(18.751,26.151) ; v1(33.55,30.25) DD1.H8@33.9,29.9
  Bottom Layer w0.2: v1(18.751,26.151) 18.751,26.704 20.026,27.979 20.026,28.074 20.753,28.801 21.214,28.801 21.976,29.563 21.976,29.951 24.8,32.775 27.575,32.775 28.75,31.6 28.75,30.625 29.243,30.132 29.26,30.15 29.84,30.15 30.09,29.9 33.2,29.9 v1(33.55,30.25)
CAS: DD1.K7 DD2.A7 | length 14.3
  Top Layer w0.2: DD2.A7@20.9,25.8 21.201,26.101 v1(21.176,26.101) ; v1(32.75,28.65) DD1.K7@33.1,28.3
  Bottom Layer w0.2: v1(21.176,26.101) 21.251,26.176 21.251,26.7 21.603,27.051 21.692,27.051 22.126,27.486 22.126,27.525 22.401,27.8 22.546,27.8 22.552,27.805 25.496,27.805 25.626,27.675 27.824,27.675 28.699,28.55 29.192,28.55 29.198,28.545 30.347,28.545 30.627,28.825 31.109,28.825 31.261,28.976 31.592,28.976 31.605,28.963 31.617,28.975 32.283,28.975 32.608,28.65 v1(32.75,28.65)
CKE: DD1.J2 DD2.A10 | length 11.1
  Top Layer w0.2: DD2.A10@23.3,25.8 v1(23.65,26.15) ; v2(23.425,30) 23.925,29.5 23.925,29.391 23.775,29.241 23.775,28.909 23.926,28.758 v2(23.926,26.901) ; v1(28.75,29.45) DD1.J2@29.1,29.1
  Bottom Layer w0.2: v2(23.425,30) 23.575,29.85 25.159,29.85 25.359,30.05 26.134,30.05 26.259,29.925 26.591,29.925 26.716,30.05 26.734,30.05 26.934,29.85 28.2,29.85 28.6,29.45 v1(28.75,29.45) ; v1(23.65,26.15) 23.65,26.625 v2(23.926,26.901)
CLK: DD1.J1 DD2.B1 | length 18.7
  Top Layer w0.2: DD2.B1@16.1,25 v1(16.45,25.35) ; v2(23.201,32.627) 23.492,32.627 25.525,30.593 v2(25.525,29.65) ; v1(27.95,29.45) DD1.J1@28.3,29.1
  Bottom Layer w0.1: v1(16.45,25.35) 16.45,26 16.9,26.45 16.9,26.466 17.134,26.7 17.15,26.7 17.351,26.901 17.351,27.042 17.585,27.276 17.733,27.276 18.256,27.8 18.485,27.8 19.176,28.491 19.176,28.726 19.226,28.776 19.521,28.776 19.726,28.981 19.726,29.276 20.225,29.775
  Bottom Layer w0.2: 20.225,29.775 20.437,29.775 20.51,29.701 20.842,29.701 21.076,29.936 21.076,30.267 21.025,30.318 21.025,30.575 23.077,32.627 v2(23.201,32.627) ; v2(25.525,29.65) 25.55,29.675 26.085,29.675 26.21,29.55 27.85,29.55 v1(27.95,29.45)
CS: DD1.J8 DD2.A9 | length 68.6
  Top Layer w0.1: DD2.A9@22.5,25.8 22.75,25.8 23.575,26.625 23.575,27.116
  Top Layer w0.2: v2(19.676,31.377) 20.748,31.377 22.25,29.875 22.25,29.834 22.484,29.6 22.599,29.6 23.575,28.624 23.575,27.116 ; v1(33.55,29.45) DD1.J8@33.9,29.1
  Bottom Layer w0.1: 33.55,29.684 33.55,29.755 33.9,30.105 33.9,30.395 33.85,30.445 34.105,30.7 36.175,30.7
  Bottom Layer w0.2: v2(19.676,31.377) 19.676,33.801 21.676,35.801 21.914,35.801 22.276,36.164 22.276,36.311 22.95,36.985 22.95,37.075 24.35,38.475 24.591,38.716 24.75,38.875 25.075,38.875 25.075,39.2 25.525,39.2 25.525,38.875 25.525,38.525 25.975,38.525 25.975,38.875 25.975,39.525 26.425,39.525 26.425,38.875 26.425,38.525 26.875,38.525 26.875,38.875 26.875,39.525 27.325,39.525 27.325,38.875 27.325,38.525 27.775,38.525 27.775,38.875 27.775,39.525 28.225,39.525 28.225,38.875 28.225,38.525 28.675,38.525 28.675,38.875 28.675,39.525 29.125,39.525 29.125,38.875 29.125,38.525 29.575,38.525 29.575,38.875 29.575,39.425 30.025,39.425 30.025,38.875 30.025,38.525 30.475,38.525 30.475,38.875 30.475,39.818 30.925,39.818 30.925,38.875 30.925,38.525 31.375,38.525 31.375,38.875 31.375,38.979 31.825,38.979 31.825,38.875 31.825,38.525 32.275,38.525 32.275,38.875 32.275,38.975 32.725,38.975 32.725,38.875 32.725,38.525 33.175,38.525 33.175,38.875 33.175,38.975 33.625,38.975 33.625,38.875 33.625,38.525 34.075,38.525 34.075,38.875 34.075,38.975 34.525,38.975 34.525,38.875 34.525,38.525 34.975,38.525 34.975,38.875 34.975,38.975 35.425,38.975 35.425,38.875 35.875,38.875 36.1,38.875 36.233,38.742 36.551,38.424 36.869,38.106 37.355,38.592 37.673,38.273 37.187,37.788 37.506,37.469 37.991,37.955 38.31,37.637 37.824,37.151 38.142,36.833 38.628,37.319 38.946,37.001 38.46,36.515 37.875,35.93 38.193,35.611 38.778,36.197 38.937,36.038 39.4,35.575 39.4,32.825 37.1,30.525 36.401,30.525 36.226,30.7 36.175,30.7 ; v1(33.55,29.45) 33.55,29.684
DQ0: DD1.R8 DD2.G9 | length 26.8
  Top Layer w0.2: DD2.G9@22.5,21 v1(22.801,21.301) ; v1(33.55,24.65) DD1.R8@33.9,24.3
  Bottom Layer w0.2: v1(22.801,21.301) 22.801,20.849 23.225,20.425 23.25,20.425 23.7,20.425 24.15,20.425 24.6,20.425 25.05,20.425 25.05,20.65 25.5,20.65 25.5,20.425 25.95,20.425 25.95,20.65 26.4,20.65 26.4,20.425 26.85,20.425 26.85,20.65 27.3,20.65 27.3,20.425 27.75,20.425 28.2,20.425 28.65,20.425 28.65,20.75 29.1,20.75 29.1,20.425 29.55,20.425 29.55,20.796 30,20.796 30,20.425 30.45,20.425 30.45,21.686 30.9,21.686 30.9,20.425 31.35,20.425 31.8,20.425 32.025,20.425 32.261,20.661 32.548,20.375 32.866,20.693 32.58,20.98 31.41,22.149 31.728,22.467 32.898,21.298 33.216,21.616 33.375,21.775 33.375,22.125 33.175,22.125 33.175,22.575 33.375,22.575 33.575,22.575 33.575,23.025 33.375,23.025 33.175,23.025 33.175,23.475 33.375,23.475 33.682,23.475 33.682,23.925 33.375,23.925 33.375,24.15 33.375,24.475 v1(33.55,24.65)
DQ1: DD1.N7 DD2.G10 | length 13.5
  Top Layer w0.2: DD2.G10@23.3,21 23.325,20.975 v1(23.9,20.975) ; v1(32.75,26.25) DD1.N7@33.1,25.9
  Bottom Layer w0.2: v1(23.9,20.975) 24.234,20.975 24.559,21.3 28.46,21.3 28.51,21.35 28.81,21.05 29.39,21.05 32.75,24.41 v1(32.75,26.25)
DQ2: DD1.R9 DD2.H2 | length 69.7
  Top Layer w0.2: v1(16.826,20.3) 17.1,20.3 ; DD2.H2@16.9,20.2 17,20.2 17.1,20.3 ; 17.2,20.4 17.1,20.3 ; v1(34.652,24.526) 34.652,24.348 DD1.R9@34.7,24.3
  Bottom Layer w0.2: v1(16.826,20.3) 17.7,20.3 18.625,19.375 20.35,19.375 20.575,19.375 21.025,19.375 21.025,18.133 21.475,18.133 21.475,19.375 21.925,19.375 21.925,18.282 22.375,18.282 22.375,19.375 22.825,19.375 22.825,17.811 23.275,17.811 23.275,19.375 23.725,19.375 23.725,18.711 24.175,18.711 24.175,19.375 24.625,19.375 24.625,19.154 25.075,19.154 25.075,19.375 25.525,19.375 25.525,17.383 25.975,17.383 25.975,19.375 26.425,19.375 26.425,17.383 26.875,17.383 26.875,19.375 27.325,19.375 27.325,17.383 27.775,17.383 27.775,19.375 28.225,19.375 28.225,17.383 28.675,17.383 28.675,19.375 29.125,19.375 29.125,17.383 29.575,17.383 29.575,19.375 30.025,19.375 30.025,17.383 30.475,17.383 30.475,19.375 30.925,19.375 30.925,17.383 31.375,17.383 31.375,19.375 31.825,19.375 31.825,17.383 32.275,17.383 32.275,19.375 32.725,19.375 32.725,17.383 33.175,17.383 33.175,19.375 33.625,19.375 33.7,19.375 35.35,21.025 35.35,23.65 34.652,24.348 v1(34.652,24.526)